# Altium PCB PCB1_ZONES_1.PcbDoc (part 2 of 2)
Units mil, origin at the board's own origin, x right, y up, seen from the top; angles counter-clockwise.
Board outline 1968.5 x 1968.5 mil, 2 copper layers (Top Layer, Bottom Layer); 97 components, 59 nets, 306 pads, 369 vias.
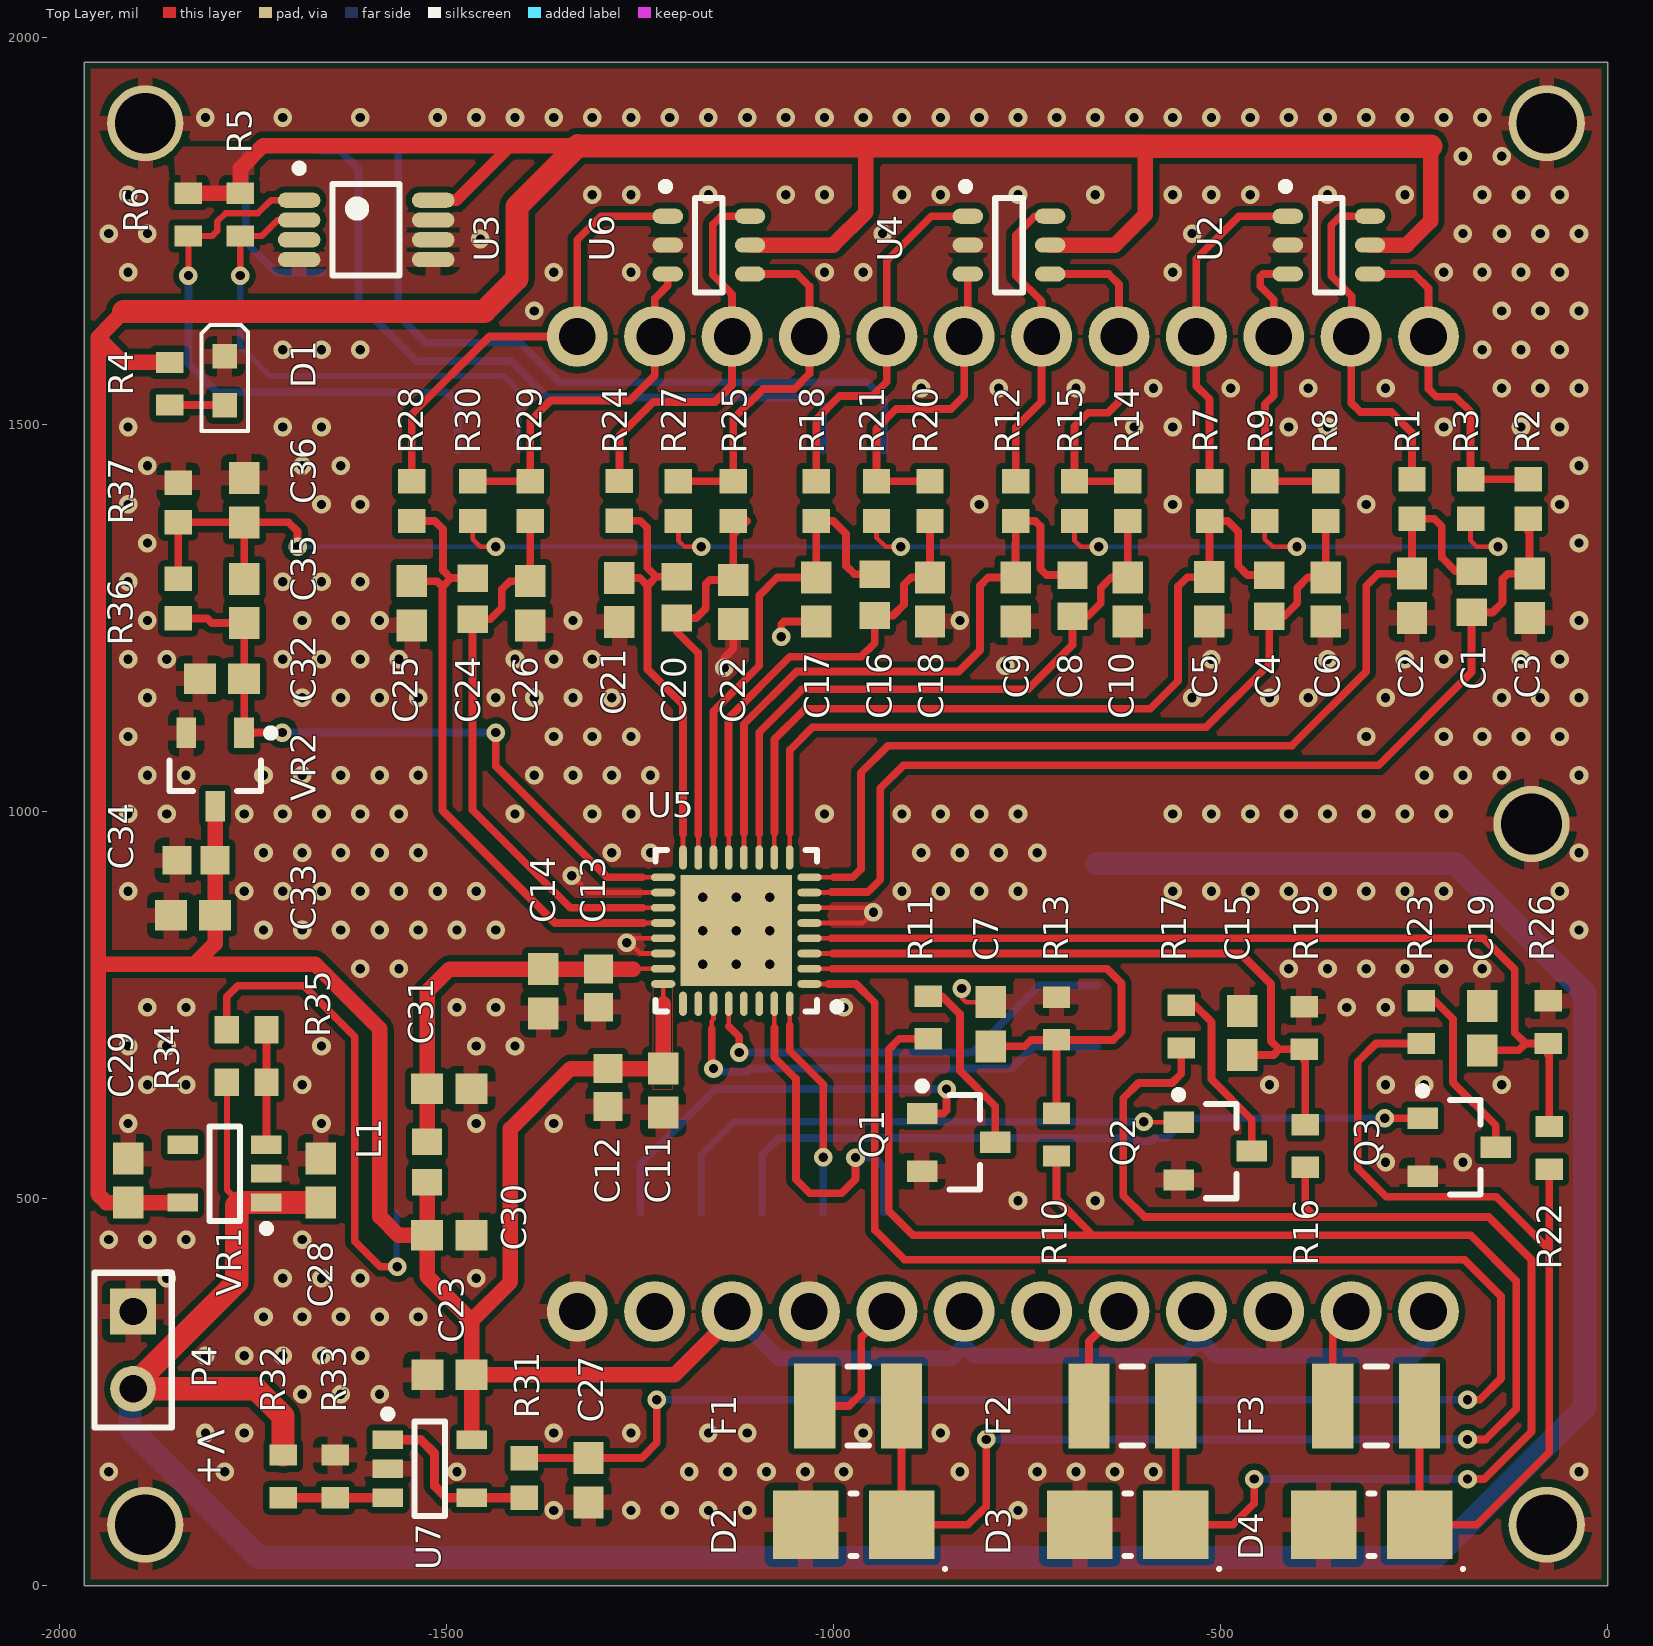
[diagram p0: Top Layer view]

## Via types
v1: diameter 24, hole 12, Top Layer to Bottom Layer, tented both sides, 332 vias
v2: diameter 24, hole 12, Top Layer to Bottom Layer, tented bottom, 37 vias

## Nets (pads, with @x,y where several pads share a name; then routed paths per layer and width w, separated by ;. In a path a pad name is that pad's centre, name@x,y a point inside that pad or via, vN(x,y) a via of type N, cw(c..) or ccw(c..) an arc to the next point about the centre after c; other vN are vias at no path point) (continued)
AGND: (continued)
  other v1: -1362.01,97.24 -1262.01,97.24 -1212.01,97.24 -1162.01,97.24 -1112.01,97.24 -762.01,97.24 -1937.01,147.24 -1787.01,147.24 -1487.01,147.24 -1187.01,147.24 -1137.01,147.24 -1087.01,147.24 -1037.01,147.24 -987.01,147.24 -837.01,147.24 -737.01,147.24 -687.01,147.24 -637.01,147.24 -587.01,147.24 -37.01,147.24 -1812.01,197.24 -1762.01,197.24 -1362.01,197.24 -1262.01,197.24 -1162.01,197.24 -1112.01,197.24 -962.01,197.24 -862.01,197.24 -1687.01,247.24 -1637.01,247.24 -1587.01,247.24 -1812.01,297.24 -1762.01,297.24 -1712.01,297.24 -1662.01,297.24 -1612.01,297.24 -1737.01,347.24 -1687.01,347.24 -1637.01,347.24 -1587.01,347.24 -1537.01,347.24 -1862.01,397.24 -1712.01,397.24 -1662.01,397.24 -1612.01,397.24 -1462.01,397.24 -1937.01,447.24 -1887.01,447.24 -1837.01,447.24 -1687.01,447.24 -762.01,497.24 -662.01,497.24 -287.01,547.24 -187.01,547.24 -1912.01,597.24 -1662.01,597.24 -1462.01,597.24 -1362.01,597.24 -1887.01,647.24 -1837.01,647.24 -1687.01,647.24 -437.01,647.24 -287.01,647.24 -237.01,647.24 -137.01,647.24 -1912.01,697.24 -1862.01,697.24 -1662.01,697.24 -1462.01,697.24 -1412.01,697.24 -1887.01,747.24 -1837.01,747.24 -1487.01,747.24 -1437.01,747.24 -987.01,747.24 -337.01,747.24 -287.01,747.24 -1612.01,797.24 -1562.01,797.24 -412.01,797.24 -362.01,797.24 -312.01,797.24 -262.01,797.24 -212.01,797.24 -162.01,797.24 -1737.01,847.24 -1687.01,847.24 -1637.01,847.24 -1587.01,847.24 -1537.01,847.24 -1487.01,847.24 -1437.01,847.24 -37.01,847.24 -1912.01,897.24 -1762.01,897.24 -1712.01,897.24 -1662.01,897.24 -1612.01,897.24 -1562.01,897.24 -1512.01,897.24 -1462.01,897.24 -912.01,897.24 -862.01,897.24 -812.01,897.24 -762.01,897.24 -562.01,897.24 -512.01,897.24 -462.01,897.24 -412.01,897.24 -362.01,897.24 -312.01,897.24 -262.01,897.24 -212.01,897.24 -62.01,897.24 -1737.01,947.24 -1687.01,947.24 -1637.01,947.24 -1587.01,947.24 -1537.01,947.24 -1287.01,947.24 -1237.01,947.24 -887.01,947.24 -837.01,947.24 -787.01,947.24 -737.01,947.24 -37.01,947.24 -1912.01,997.24 -1862.01,997.24 -1762.01,997.24 -1712.01,997.24 -1662.01,997.24 -1612.01,997.24 -1562.01,997.24 -1412.01,997.24 -1312.01,997.24 -1262.01,997.24 -1012.01,997.24 -912.01,997.24 -862.01,997.24 -812.01,997.24 -762.01,997.24 -562.01,997.24 -512.01,997.24 -462.01,997.24 -412.01,997.24 -362.01,997.24 -312.01,997.24 -262.01,997.24 -212.01,997.24 -1887.01,1047.24 -1837.01,1047.24 -1737.01,1047.24 -1687.01,1047.24 -1637.01,1047.24 -1587.01,1047.24 -1537.01,1047.24 -1387.01,1047.24 -1337.01,1047.24 -1287.01,1047.24 -1237.01,1047.24 -237.01,1047.24 -187.01,1047.24 -137.01,1047.24 -37.01,1047.24 -1912.01,1097.24 -1362.01,1097.24 -1312.01,1097.24 -1262.01,1097.24 -312.01,1097.24 -212.01,1097.24 -162.01,1097.24 -112.01,1097.24 -62.01,1097.24 -1887.01,1147.24 -1687.01,1147.24 -1637.01,1147.24 -1587.01,1147.24 -1537.01,1147.24 -1437.01,1147.24 -1387.01,1147.24 -1337.01,1147.24 -1287.01,1147.24 -537.01,1147.24 -437.01,1147.24 -387.01,1147.24 -287.01,1147.24 -137.01,1147.24 -87.01,1147.24 -37.01,1147.24 -778.54,1188.98 -1912.01,1197.24 -1862.01,1197.24 -1712.01,1197.24 -1662.01,1197.24 -1612.01,1197.24 -1562.01,1197.24 -1412.01,1197.24 -1362.01,1197.24 -1312.01,1197.24 -512.01,1197.24 -362.01,1197.24 -262.01,1197.24 -212.01,1197.24 -112.01,1197.24 -62.01,1197.24 -1887.01,1247.24 -1687.01,1247.24 -1637.01,1247.24 -1587.01,1247.24 -1337.01,1247.24 -837.01,1247.24 -37.01,1247.24 -1912.01,1297.24 -1712.01,1297.24 -1662.01,1297.24 -1612.01,1297.24 -1887.01,1347.24 -37.01,1347.24 -1912.01,1397.24 -1662.01,1397.24 -1612.01,1397.24 -812.01,1397.24 -562.01,1397.24 -312.01,1397.24 -62.01,1397.24 -1887.01,1447.24 -1687.01,1447.24 -1637.01,1447.24 -37.01,1447.24 -1912.01,1497.24 -1712.01,1497.24 -1662.01,1497.24 -612.01,1497.24 -562.01,1497.24 -412.01,1497.24 -362.01,1497.24 -212.01,1497.24 -112.01,1497.24 -62.01,1497.24 -887.01,1547.24 -787.01,1547.24 -687.01,1547.24 -587.01,1547.24 -487.01,1547.24 -387.01,1547.24 -287.01,1547.24 -137.01,1547.24 -87.01,1547.24 -37.01,1547.24 -1712.01,1597.24 -1662.01,1597.24 -1612.01,1597.24 -162.01,1597.24 -112.01,1597.24 -62.01,1597.24 -1387.01,1647.24 -137.01,1647.24 -87.01,1647.24 -37.01,1647.24 -1912.01,1697.24 -1362.01,1697.24 -1262.01,1697.24 -1012.01,1697.24 -962.01,1697.24 -562.01,1697.24 -212.01,1697.24 -162.01,1697.24 -112.01,1697.24 -62.01,1697.24 -1456.69,1740.16 -1937.01,1747.24 -1887.01,1747.24 -937.01,1747.24 -537.01,1747.24 -187.01,1747.24 -137.01,1747.24 -87.01,1747.24 -37.01,1747.24 -1912.01,1797.24 -1312.01,1797.24 -1262.01,1797.24 -1162.01,1797.24 -1062.01,1797.24 -1012.01,1797.24 -912.01,1797.24 -862.01,1797.24 -762.01,1797.24 -662.01,1797.24 -562.01,1797.24 -512.01,1797.24 -462.01,1797.24 -362.01,1797.24 -262.01,1797.24 -162.01,1797.24 -112.01,1797.24 -62.01,1797.24 -187.01,1847.24 -137.01,1847.24 -1812.01,1897.24 -1712.01,1897.24 -1612.01,1897.24 -1512.01,1897.24 -1462.01,1897.24 -1412.01,1897.24 -1362.01,1897.24 -1312.01,1897.24 -1262.01,1897.24 -1212.01,1897.24 -1162.01,1897.24 -1112.01,1897.24 -1062.01,1897.24 -1012.01,1897.24 -962.01,1897.24 -912.01,1897.24 -862.01,1897.24 -812.01,1897.24 -762.01,1897.24 -712.01,1897.24 -662.01,1897.24 -612.01,1897.24 -562.01,1897.24 -512.01,1897.24 -462.01,1897.24 -412.01,1897.24 -362.01,1897.24 -312.01,1897.24 -262.01,1897.24 -212.01,1897.24 -162.01,1897.24
  other v2: -1169.29,803.15 -1125.98,803.15 -1082.68,803.15 -1169.29,889.76 -1125.98,889.76 -1082.68,889.76
AN1: C7.1 R10.1 R13.2 U5.2 | length 745.3
  Top Layer w6: U5.2 -1001.97,797.24
  Top Layer w10: -1001.97,797.24 -647.01,797.24 -628.26,778.5 -628.26,715.99 -638.98,705.28 R13.2 ; C7.1 -753.23,697.02 -744.98,705.28 R13.2 ; R10.1 R13.2
AN2: C15.1 R16.1 R19.2 U5.3 | length 882.6
  Top Layer w6: U5.3 -1000.98,816.93
  Top Layer w10: -1000.98,816.93 -474.41,816.93 -435.04,777.56 -435.04,703.74 -424.45,693.15 ; C15.1 -431.79,685.81 -424.45,693.15 ; R16.1 -390.96,678.06 -392.27,679.37 R19.2 -424.45,693.15
AN3: C19.1 R22.1 R26.2 U5.4 | length 1226.1
  Top Layer w6: U5.4 -1002.95,836.61
  Top Layer w10: -1002.95,836.61 -160.43,836.61 -120.08,796.26 -120.08,714.57 -106.1,700.59 ; C19.1 -114.96,691.73 -106.1,700.59 ; R22.1 -75.65,685.5 -76.96,686.81 R26.2 -106.1,700.59
BS1: C27.1 R31.2 U5.1 | length 2676.6
  Top Layer w6: U5.1 -1007.32,777.56
  Top Layer w10: R31.2 C27.1 -1248.54,164.84 -1228.86,184.53 v2(-1228.86,240.16) ; -1007.32,777.56 -971.32,777.56 -947.01,753.24 -947.01,459.69 -908.57,421.26 -185.04,421.26 -137.8,374.02 -137.8,267.72 -165.35,240.16 v2(-181.1,240.16)
  Bottom Layer w10: v2(-1228.86,240.16) v2(-181.1,240.16)
I1: F1.1 P2.5 | length 186.6
  Top Layer w10: F1.1 -980.31,232.28 -964.57,248.03 -964.57,321.26 P2.5
I2: F2.1 P2.8 | length 138.1
  Top Layer w10: F2.1 -670.28,315.55 P2.8
I2C_SCL: R6.1 U1.2 U3.1 | length 765.1
  Top Layer w8: v2(-1834,1692.91) R6.1 -1803.15,1744.09 -1796.62,1750.63 -1796.62,1762.84 -1786.03,1773.43 -1744.21,1773.43 -1727.29,1790.35 U3.1
  Bottom Layer w10: v2(-1834,1692.91) -1834,1579.07 -1797.17,1542.24 -1499.92,1542.24 -1486.22,1528.54 U1.2
I2C_SDA: R5.1 U1.3 U3.2 | length 687.9
  Top Layer w8: v2(-1766.9,1692.91) R5.1 -1739.17,1744.09 -1718.5,1764.76 U3.2
  Bottom Layer w8: v2(-1766.9,1692.91) -1766.9,1601.55 -1728.46,1563.11 -1426.43,1563.11 -1407.48,1544.15 U1.3
NetD1_1: D1.1 R4.2 | length 71.1
  Top Layer w10: R4.2 D1.1
NetD2_2: D2.2 F1.2 R10.2 R11.2 | length 2453.9
  Top Layer w10: F1.2 D2.2 -826.77,78.74 -803.15,102.36 v2(-803.15,188.98) ; R11.2 -915.23,706.69 -929.01,692.91 -929.01,484.13 -897.64,452.76 -665.35,452.76 ; R10.2 -712.27,499.68 -665.35,452.76 ; v2@-173.23,188.98 -157.48,188.98 -118.11,228.35 -118.11,393.7 -177.17,452.76 -665.35,452.76
  Bottom Layer w10: v2(-803.15,188.98) v2(-181.1,188.98)
NetD3_2: D3.2 F2.2 R16.2 R17.2 | length 1782.4
  Top Layer w10: F2.2 D3.2 -484.25,78.74 -456.69,106.3 v2(-456.69,137.8) ; R17.2 -551.18,661.42 -562.99,649.61 -606.3,649.61 -625.98,629.92 -625.98,503.94 -598.43,476.38 -377.95,476.38 ; R16.2 -390.96,489.39 -377.95,476.38 ; v2(-181.1,137.8) -159.58,137.8 -98.43,198.95 -98.43,421.26 -153.54,476.38 -377.95,476.38
  Bottom Layer w10: v2(-456.69,137.8) v2(-181.1,137.8)
NetD4_2: D4.2 F3.2 R22.2 R23.2 | length 1245.7
  Top Layer w10: F3.2 D4.2 -169.29,78.74 -75.65,172.38 -75.65,433.92 ; R23.2 -299.41,700.59 -322.83,677.17 -322.83,539.37 -285.91,502.45 -144.18,502.45 -75.65,433.92 ; R22.2 -75.65,433.92
NetF3_1: F3.1 P2.11 | length 131.9
  Top Layer w10: F3.1 -355.32,330.51 P2.11
NetQ1_3: Q1.3 R11.1 | length 235.2
  Top Layer w10: R11.1 -860.24,761.81 -837.01,738.58 -837.01,665.24 -791.34,619.57 Q1.3
NetQ2_3: Q2.3 R17.1 | length 236.5
  Top Layer w10: R17.1 -533.46,750 -512.01,728.54 -512.01,654.24 -460.03,602.27 Q2.3
NetQ3_3: Q3.3 R23.1 | length 239.4
  Top Layer w10: R23.1 -223.31,755.71 -200.01,732.41 -200.01,650.24 -144.71,594.95 Q3.3
NetR31_1: R31.1 U7.1 U7.4 | length 231.6
  Top Layer w12: U7.1 -1533.79,188.46 -1516.01,170.69 -1516.01,129.24 -1500.43,113.66 U7.4 R31.1
NetR32_2: R32.2 R33.2 U7.3 | length 135.2
  Top Layer w12: R32.2 R33.2 U7.3
NetR34_1: R34.1 R35.2 VR1.3 | length 148.6
  Top Layer w10: VR1.3 R34.1 R35.2
NetR35_1: R35.1 U1.28 | length 644.1
  Top Layer w10: R35.1 -1784.33,760.92 -1770.01,775.24 -1685.01,775.24 -1619.01,709.24 -1619.01,445.24 -1586.01,412.24 v2(-1564.01,412.24)
  Bottom Layer w8: U1.28 -1564.96,413.2 v2(-1564.01,412.24)
P_N1: P3.2 R1.2 U2.6 | length 450.7
  Top Layer w10: U2.6 -345.47,1769.69 -357.28,1757.87 -357.28,1692.91 -330.71,1666.34 -330.71,1614.96 P3.2 -331.5,1528.35 -319.88,1516.73 -279.53,1516.73 -252.86,1490.07 R1.2
P_N2: P3.4 R7.2 U2.1 | length 435.6
  Top Layer w10: R7.2 -514.44,1533.14 -531.5,1550.2 P3.4 -531.5,1714.57 -476.38,1769.69 U2.1
P_N3: P3.6 R12.2 U4.6 | length 400.2
  Top Layer w10: R12.2 -765.01,1496.8 -731.5,1530.31 P3.6 -731.5,1659.65 -764.76,1692.91 -764.76,1745.08 -740.16,1769.69 U4.6
P_N4: P3.8 R18.2 U4.1 | length 476.3
  Top Layer w10: R18.2 -1022.67,1506.92 -992.18,1537.4 -949.8,1537.4 -931.5,1555.71 P3.8 -931.5,1712.2 -874.02,1769.69 U4.1
P_N5: P3.10 R24.2 U6.6 | length 501.5
  Top Layer w10: R24.2 -1277.01,1485.79 -1233.27,1529.53 -1153.54,1529.53 -1131.5,1551.57 P3.10 -1131.5,1668.9 -1156.5,1693.9 -1156.5,1758.86 -1145.67,1769.69 U6.6
P_N6: P3.12 R28.2 U6.1 | length 596.8
  Top Layer w10: R28.2 -1545.28,1513.78 -1444.88,1614.17 P3.12 -1331.5,1739.37 -1301.18,1769.69 U6.1
P_P1: P3.1 R2.2 R3.1 U2.4 | length 441.1
  Top Layer w10: U2.4 -250,1694.88 -231.5,1676.38 P3.1 -231.5,1546.46 -221.46,1536.42 -196.85,1536.42 -177.17,1516.73 R3.1 R2.2
P_P2: P3.3 R8.2 R9.1 U2.3 | length 392
  Top Layer w10: U2.3 -445.87,1694.88 -448.82,1691.93 -448.82,1679.13 -431.5,1661.81 P3.3 -431.5,1537.99 -442.91,1526.57 R9.1 R8.2
P_P3: P3.5 R14.2 R15.1 U4.4 | length 456.8
  Top Layer w10: U4.4 -644.69,1694.88 -631.5,1681.69 P3.5 -631.5,1529.92 -645.67,1515.75 -671.26,1515.75 -688.98,1498.03 R15.1 R14.2
P_P4: P3.7 R20.2 R21.1 U4.3 | length 427.5
  Top Layer w10: R20.2 R21.1 -944.88,1495.08 -919.29,1520.67 -848.43,1520.67 -831.5,1537.6 P3.7 -826.77,1618.9 U4.3
P_P5: P3.9 R25.2 R27.1 U6.4 | length 470.7
  Top Layer w10: R27.1 R25.2 -1129.99,1507.81 -1091.54,1546.26 -1051.18,1546.26 -1031.5,1565.94 P3.9 -1031.5,1679.13 -1047.24,1694.88 U6.4
P_P6: P3.11 R29.2 R30.1 U6.3 | length 475.7
  Top Layer w10: R30.1 R29.2 -1392.27,1505.36 -1366.14,1531.5 -1263.78,1531.5 -1231.5,1563.78 P3.11 -1231.5,1663.19 -1214.57,1680.12 U6.3
SPI2_MISO: U1.18 U5.27 | length 597.1
  Top Layer w6: -1157.83,719.24 -1157.83,729.43 -1155.51,731.74 U5.27
  Top Layer w10: -1157.83,719.24 -1157.83,670.56 v2(-1155.51,668.24)
  Bottom Layer w10: v2(-1155.51,668.24) -1151.24,663.98 -1111.69,663.98 -1107.42,668.24 -770.01,668.24 -741.4,696.85 U1.18
SPI2_MOSI: U1.17 U5.28 | length 567.2
  Top Layer w6: -1135.83,723.06 U5.28
  Top Layer w10: -1135.83,723.06 -1122.05,709.28 v2(-1122.05,688.98)
  Bottom Layer w10: v2(-1122.05,688.98) -821.28,688.98 -734.66,775.59 U1.17
SPI2_NSS: U1.21 U5.32 | length 288.3
  Top Layer w6: -1057.09,724.24 U5.32
  Top Layer w10: -1057.09,724.24 -1057.09,691.24 -1013.01,647.17 -1013.78,646.39 v1(-1013.78,553.47)
  Bottom Layer w10: U1.21 v1(-1013.78,553.47)
SPI2_SCK: U1.20 U5.31 | length 458.5
  Top Layer w6: -1076.77,721.01 U5.31
  Top Layer w10: -1076.77,721.01 -1076.77,683.01 -1049.01,655.24 -1049.01,525.24 -1031.01,507.24 -990.01,507.24 -972.01,525.24 v2(-972.01,553.24)
  Bottom Layer w10: v2(-972.01,553.24) -948.01,553.24 -935.04,540.28 U1.20
SWDIO: SWD.2 U1.9 | length 952.7
  Bottom Layer w10: SWD.2 -1562.99,1642.58 -1563.42,1642.16 -1527.56,1606.3 -1405.51,1606.3 -1354.33,1555.12 -956.69,1555.12 -935.04,1533.46 U1.9
SWSCK: SWD.1 U1.8 | length 944.3
  Bottom Layer w10: SWD.1 -1637.8,1854.33 -1614.17,1830.71 -1614.17,1657.48 -1539.37,1582.68 -1417.32,1582.68 -1370.08,1535.43 -1023.62,1535.43 -1013.78,1525.59 U1.8
TC_N1: C1.1 C2.1 R1.1 U5.8 | length 1278.7
  Top Layer w6: U5.8 -1000,915.35
  Top Layer w10: -1000,915.35 -975.39,915.35 -965.01,925.74 -965.01,1050.24 -930.01,1085.24 -408.01,1085.24 -312.01,1181.24 -312.01,1292.24 -296.51,1307.75 C2.1 -252.86,1360.08 R1.1 -224.08,1378.61 -214.57,1369.09 -214.57,1328.74 -196.6,1310.78 C1.1
TC_N2: C4.1 C5.1 R7.1 U5.10 | length 1077.6
  Top Layer w6: U5.10 -1076.77,973.01
  Top Layer w10: -1076.77,973.01 -1076.77,1093.48 -1037.01,1133.24 -591.17,1133.24 -555.12,1169.29 -555.12,1291.34 -543.31,1303.15 C5.1 -514.76,1323.82 -514.44,1324.14 R7.1 -490.98,1375.83 -477.36,1362.2 -477.36,1317.91 -465.38,1305.93 C4.1
TC_N3: C8.1 C9.1 R12.1 U5.12 | length 858.4
  Top Layer w6: U5.12 -1116.14,972.38
  Top Layer w10: -1116.14,972.38 -1116.14,1113.11 -1048.01,1181.24 -838.44,1181.24 -811.02,1208.66 -811.02,1292.32 -800.44,1302.9 C9.1 -765.07,1347.24 -765.01,1347.31 R12.1 -739.59,1375.83 -733.01,1369.24 -733.01,1314.24 -724.7,1305.93 C8.1
TC_N4: C16.1 C17.1 R18.1 U5.14 | length 647.7
  Top Layer w6: U5.14 -1155.51,969.74
  Top Layer w10: -1155.51,969.74 -1155.51,1129.92 -1096.46,1188.98 -1096.46,1279.53 -1073.08,1302.9 C17.1 -1022.67,1360.08 R18.1 -1000.83,1375.83 -984.25,1359.25 -984.25,1317.91 -973.18,1306.84 C16.1
TC_N5: C20.1 C21.1 R24.1 U5.16 | length 566.5
  Top Layer w6: U5.16 -1194.88,971.37
  Top Layer w10: C21.1@-1282.01,1302.24 C21.1 -1250.74,1302.24 -1240.74,1292.24 ; R24.1 -1250.01,1376.24 -1241.01,1367.24 -1241.01,1315.24 -1229.38,1303.61 ; C20.1 -1229.38,1303.61 ; -1194.88,971.37 -1194.88,1138.12 -1240.74,1183.98 -1240.74,1292.24 ; -1240.74,1292.24 -1229.38,1303.61
TC_N6: C24.1 C25.1 R28.1 U5.20 | length 833
  Top Layer w6: -1246.01,856.3 U5.20
  Top Layer w10: C25.1 -1512.82,1298.06 -1505.64,1290.88 ; R28.1 -1515.59,1375.83 -1505.01,1365.24 -1505.01,1311.94 -1494.79,1301.72 ; C24.1 -1494.52,1302 -1494.79,1301.72 ; -1246.01,856.3 -1360.24,856.3 -1505.64,1001.7 -1505.64,1290.88 ; -1505.64,1290.88 -1494.79,1301.72
TC_P1: C1.2 C3.2 R2.1 U5.7 | length 1305.2
  Top Layer w6: U5.7 -1003.58,895.67 -1003.01,896.24
  Top Layer w10: -1003.01,896.24 -956.01,896.24 -940.01,912.24 -940.01,1030.24 -910.01,1060.24 -296.01,1060.24 -175.9,1180.36 C1.2 -148.87,1257.63 -135.83,1270.67 -135.83,1301.18 -129.26,1307.75 C3.2 -100.9,1360.9 -102.86,1362.86 R2.1
TC_P2: C4.2 C6.2 R8.1 U5.9 | length 1044.6
  Top Layer w6: U5.9 -1057.09,972.44
  Top Layer w10: -1057.09,972.44 -1057.09,1079.72 -1027.57,1109.24 -519.01,1109.24 -437.47,1190.78 C4.2 -417.79,1252.79 -401.01,1269.56 -401.01,1289.24 -387.35,1302.9 C6.2 R8.1
TC_P3: C8.2 C10.2 R14.1 U5.11 | length 827.3
  Top Layer w6: U5.11 -1096.46,971.8
  Top Layer w10: -1096.46,971.8 -1096.46,1102.8 -1041.01,1158.24 -749.01,1158.24 -691.58,1215.67 C8.2 -671.9,1252.79 -655.01,1269.68 -655.01,1289.24 -641.35,1302.9 C10.2 R14.1
TC_P4: C16.2 C18.2 R20.1 U5.13 | length 623.8
  Top Layer w6: -1136.01,971.24 -1135.83,971.06 U5.13
  Top Layer w10: -1136.01,971.24 -1136.01,1121.24 -1057.01,1200.24 -965.01,1200.24 -947.21,1218.04 C16.2@-947.21,1252.79 ; C16.2 -923.47,1253.69 -909.45,1267.72 -909.45,1293.31 -899.85,1302.9 C18.2 R20.1
TC_P5: C20.2 C22.2 R25.1 U5.15 | length 533.8
  Top Layer w6: U5.15 -1175.2,970.47
  Top Layer w10: -1175.2,970.47 -1175.2,1205.12 -1202.82,1232.75 C20.2 -1177.69,1250.46 -1165.35,1262.8 -1165.35,1294.29 -1159.97,1299.68 C22.2 -1129.99,1358.11 -1112.27,1375.83 R25.1
TC_P6: C24.2 C26.2 R29.1 U5.19 | length 730.9
  Top Layer w6: -1247.01,875.98 U5.19
  Top Layer w10: C24.2@-1466.81,1247.94 -1466.81,1002.24 -1340.55,875.98 -1247.01,875.98 ; C24.2 -1444.07,1248.85 -1429.13,1263.78 -1429.13,1287.4 -1418.47,1298.06 C26.2 R29.1
V\I1: Q1.1 U1.24 | length 559.5
  Top Layer w10: Q1.1 -858.27,610.24 -854.33,614.17 v2(-854.33,641.73)
  Bottom Layer w10: U1.24 -1250,544.25 -1151.54,642.72 -1150.55,641.73 v2(-854.33,641.73)
V\I2: Q2.1 U1.23 | length 709.2
  Top Layer w6: v2(-599.41,599.41) -599.03,599.03 Q2.1
  Bottom Layer w10: U1.23 -1171.26,556.99 -1128.84,599.41 v2(-599.41,599.41)
V\I3: Q3.1 U1.22 | length 951.9
  Top Layer w10: v2(-288.01,604.03) Q3.1
  Bottom Layer w10: U1.22 -1092.52,556.73 -1070.78,578.47 -613.83,578.47 -609.76,574.41 -589.05,574.41 -584.99,578.47 -569.78,578.47 -544.22,604.03 v2(-288.01,604.03) v2@-288.01,605.24
Vbat: C28.1 P4.2 R32.1 R34.2 U1.15 VR1.1 | length 4146.5
  Top Layer w8: R34.2 -1784.33,511.69 -1767.72,495.08
  Top Layer w30: R32.1 -1711.59,218.83 -1747.09,254.33 P4.2 -1909.45,254.33 -1771.65,392.13 -1771.65,491.14 -1767.72,495.08 VR1.1 -1668.1,495.08 C28.1@-1663.1,500.08
  Bottom Layer w30: P4.2@-1909.45,254.33 -1909.45,202.68 -1743.18,36.42 -223.43,36.42 -29.53,230.31 -29.53,765.75 -196.85,933.07 U1.15
Vbias: C35.1 C36.2 R3.2 R9.2 R15.2 R21.2 R27.2 R30.2 R36.2 R37.1 | length 2245.3
  Top Layer w6: R30.2 -1466.54,1352.36 -1456.69,1342.52 v2(-1437.01,1342.52) ; R27.2 -1200.79,1350.39 -1192.91,1342.52 v2(-1171.26,1342.52) ; R21.2 -944.88,1354.33 -933.07,1342.52 v2(-913.39,1342.52) ; R15.2 -688.98,1350.39 -681.1,1342.52 v2(-657.48,1342.52) ; R9.2 -442.91,1352.36 -433.07,1342.52 v2(-401.57,1342.52) ; R3.2 -177.17,1350.39 -169.29,1342.52 v2(-141.73,1342.52)
  Top Layer w10: R36.2 R36.2@-1847.01,1301.28 ; R36.2@-1846.81,1301.08 R36.2@-1847.01,1301.28 ; C35.1 C36.2 ; v2(-1692.91,1342.52) -1692.91,1362.2 -1704.79,1374.08 C36.2 ; R36.2@-1847.01,1301.28 R37.1 C36.2
  Bottom Layer w6: v2(-1692.91,1342.52) v2(-1437.01,1342.52) v2(-1171.26,1342.52) v2(-913.39,1342.52) v2(-657.48,1342.52) v2(-401.57,1342.52) v2(-141.73,1342.52)
Vref: C32.2 C35.2 R36.1 U5.17 VR2.1 | length 873.8
  Top Layer w6: -1248.01,915.35 U5.17
  Top Layer w10: R36.1@-1846.81,1249.9 -1809.67,1249.9 -1803.76,1244 C35.2 C32.2 VR2.1 -1749.21,1101.93 -1748.78,1102.36 v2(-1712.6,1102.36) ; v2(-1437.01,1102.36) -1437.01,1059.24 -1293.12,915.35 -1248.01,915.35
  Bottom Layer w10: v2(-1712.6,1102.36) v2(-1437.01,1102.36)
pads on no net: P2.2 SWD. U1.4 U1.5 U1.6 U1.7 U1.11 U1.12 U1.13 U1.25 U1.26 U1.27 U3.3 U5.25 U5.26 U5.29 U5.30 VR1.4

## Polygon pours and split planes (outlines as drawn)
AGND on Top Layer "A" (solid, pour order 18): -1968.5,0 0,0 0,1968.5 -1968.5,1968.5
3v3E on Top Layer "A" (solid, pour order 14): -1850.39,1791.34 -1849.41,1790.35 -1749.02,1790.35 -1749.02,1847.44 -1744.09,1852.36 -1750.98,1859.25 -1851.38,1859.25 -1852.36,1858.27
3v3E on Top Layer "A" (solid, pour order 16): -1233.27,779.53 -1232.28,780.51 -1208.66,780.51 -1208.66,641.73 -1209.65,640.75 -1233.27,640.75
AGND on Bottom Layer "A" (solid, pour order 20): -1968.5,0 0,0 0,1968.5 -1968.5,1968.5

## Silkscreen, mask and mechanical layers (free items; w line width, h text height)
Top Overlay:
  text "V+" at -1833.44,202.24 h60 r270
Bottom Overlay:
  drawing of 1684 lines, arcs and shapes, not listed
  text "NRESET" at -1801.18,1938.98 h32 r90
  text "SWSCK" at -1702.76,1938.98 h32 r90
  text "SWDIO" at -1604.33,1938.98 h32 r90
  text "Therm input" at -1446.15,1881.38 h60 r90
  text "NRESET / SOLDER PAD" at -1712.6,1692.91 h32
  text "LoRa  Therm V1.0" at -172.24,1208.66 h60 r90
  text "Analog Input" at -1473.05,345.47 h60 r90
  text "V+" at -1812.99,234.25 h60 r90
  text "Alejo, 2019" at -697.83,154.53 h60
Mechanical 1:
  the board outline again, w10

## Text inside footprints (layer, text, board x,y; h text height)
U1: Bottom Overlay "LoRa Module V1" at -974.41,954.72 h32